# Altium PCB PCB1.PcbDoc
Units mm, origin at the board's own origin, x right, y up, seen from the top; angles counter-clockwise.
Board outline 221.8 x 169.3 mm, 4 copper layers (Top Layer, Mid Layer 1, Mid Layer 2, Bottom Layer), stack 1.592 mm thick; 54 components, 347 nets, 379 pads, 86 vias.
Unrouted connection lines stored in the file: 199.
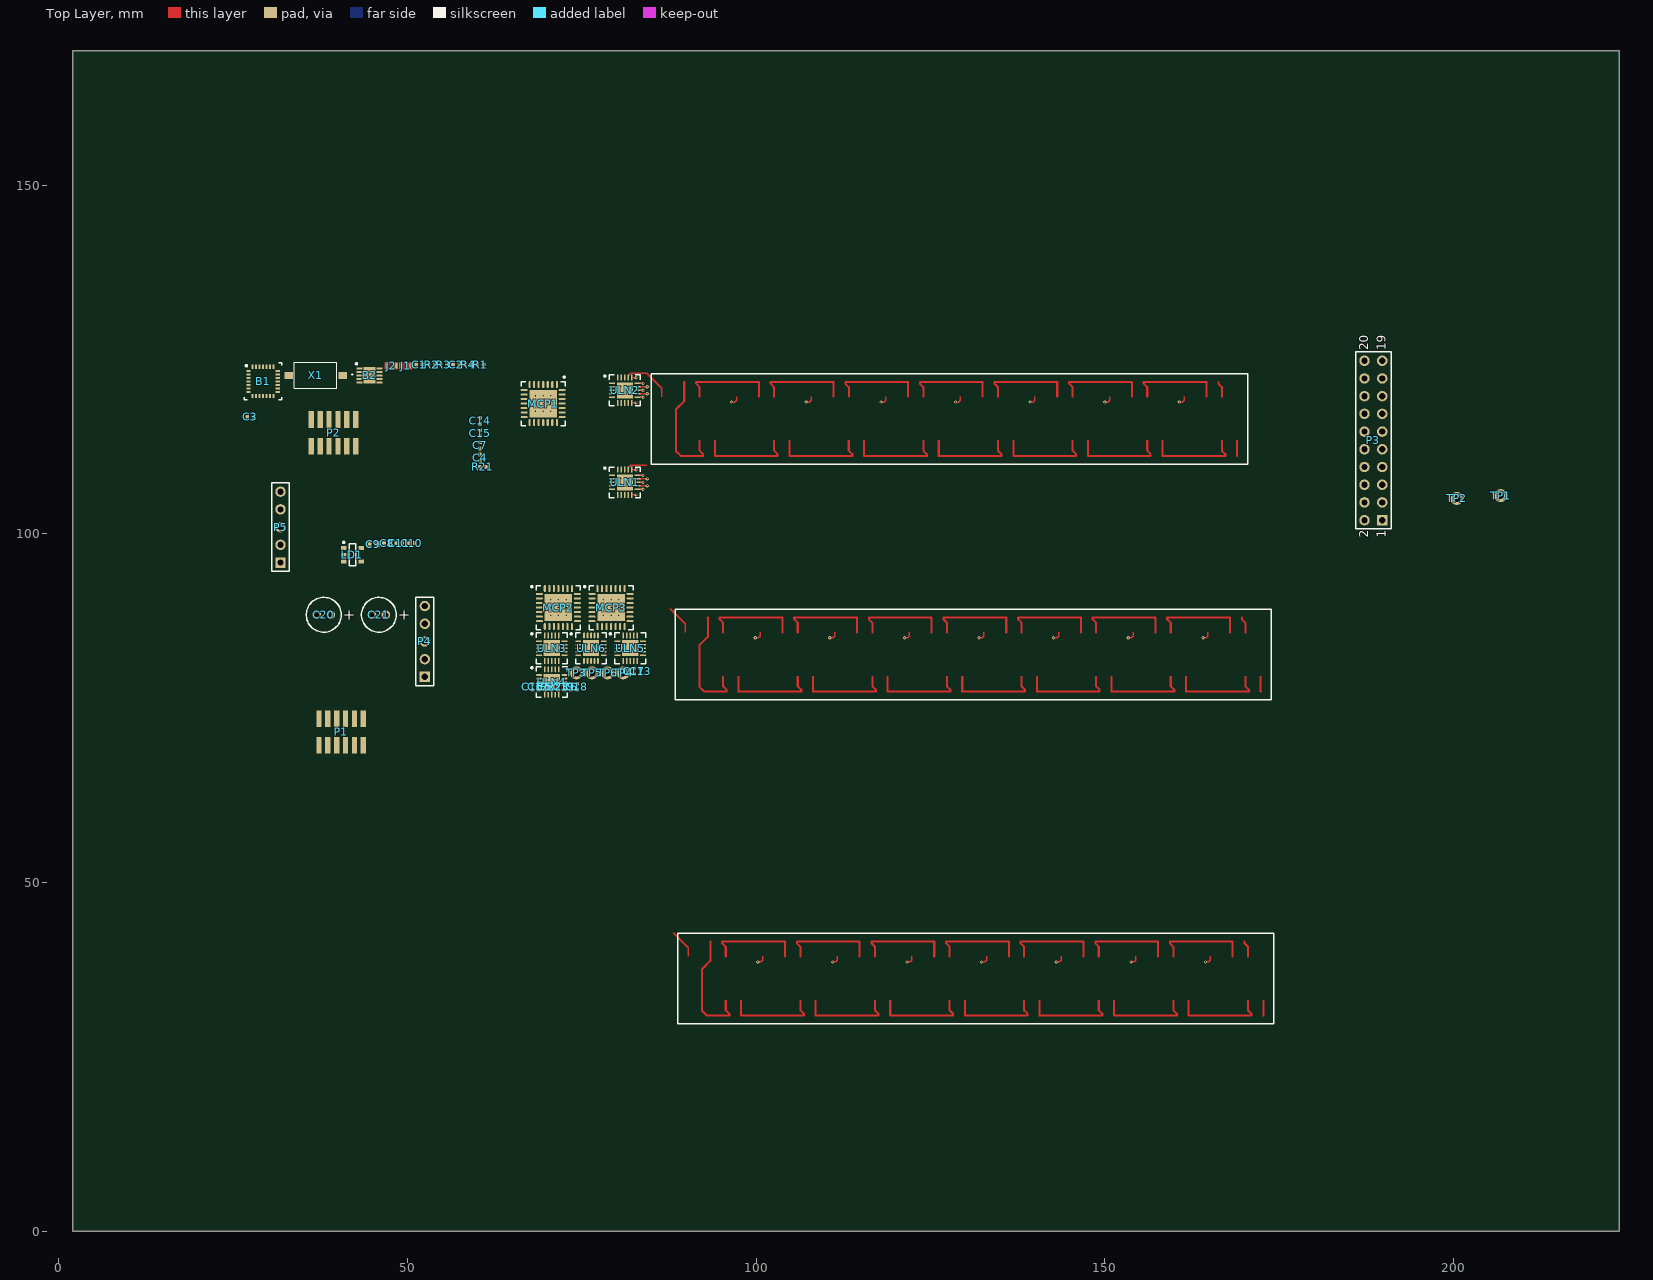
[diagram p0: Top Layer view]
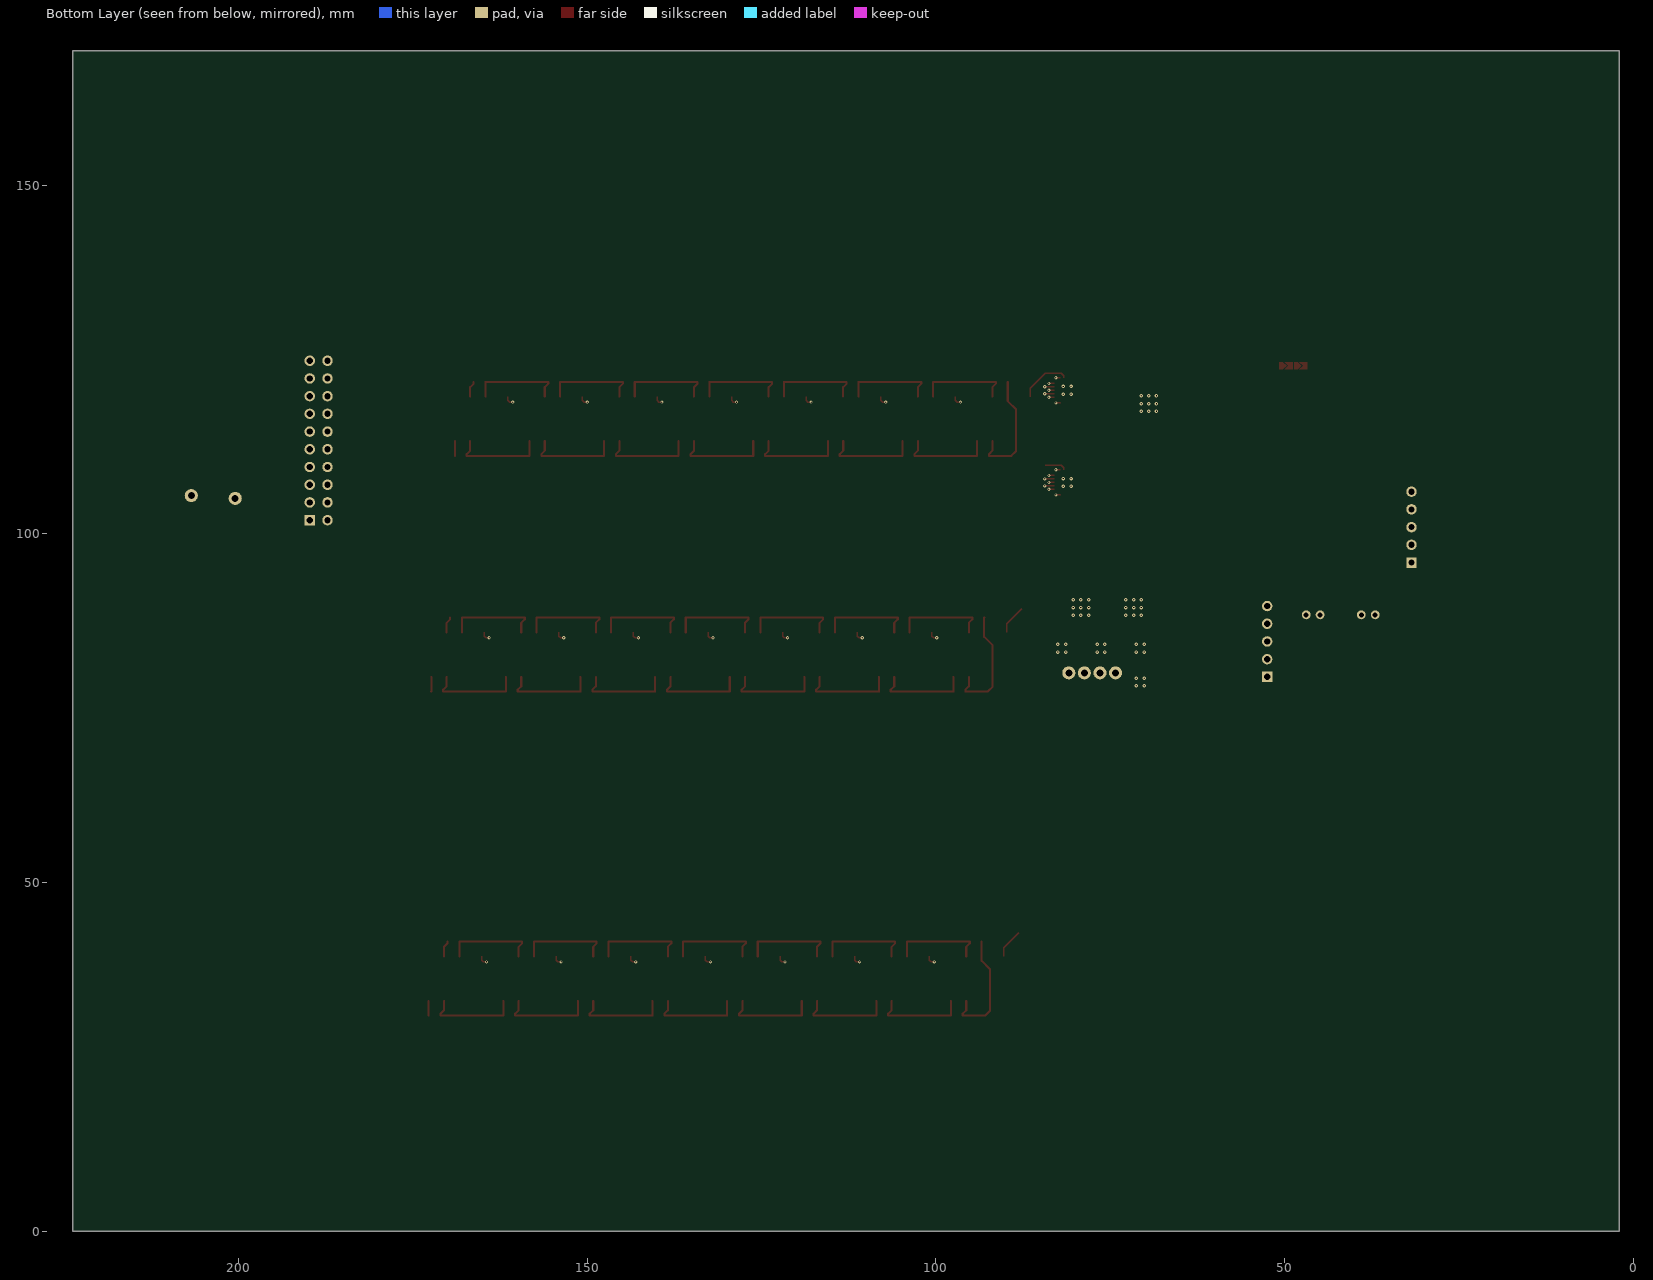
[diagram p1: Bottom Layer view, seen from below]
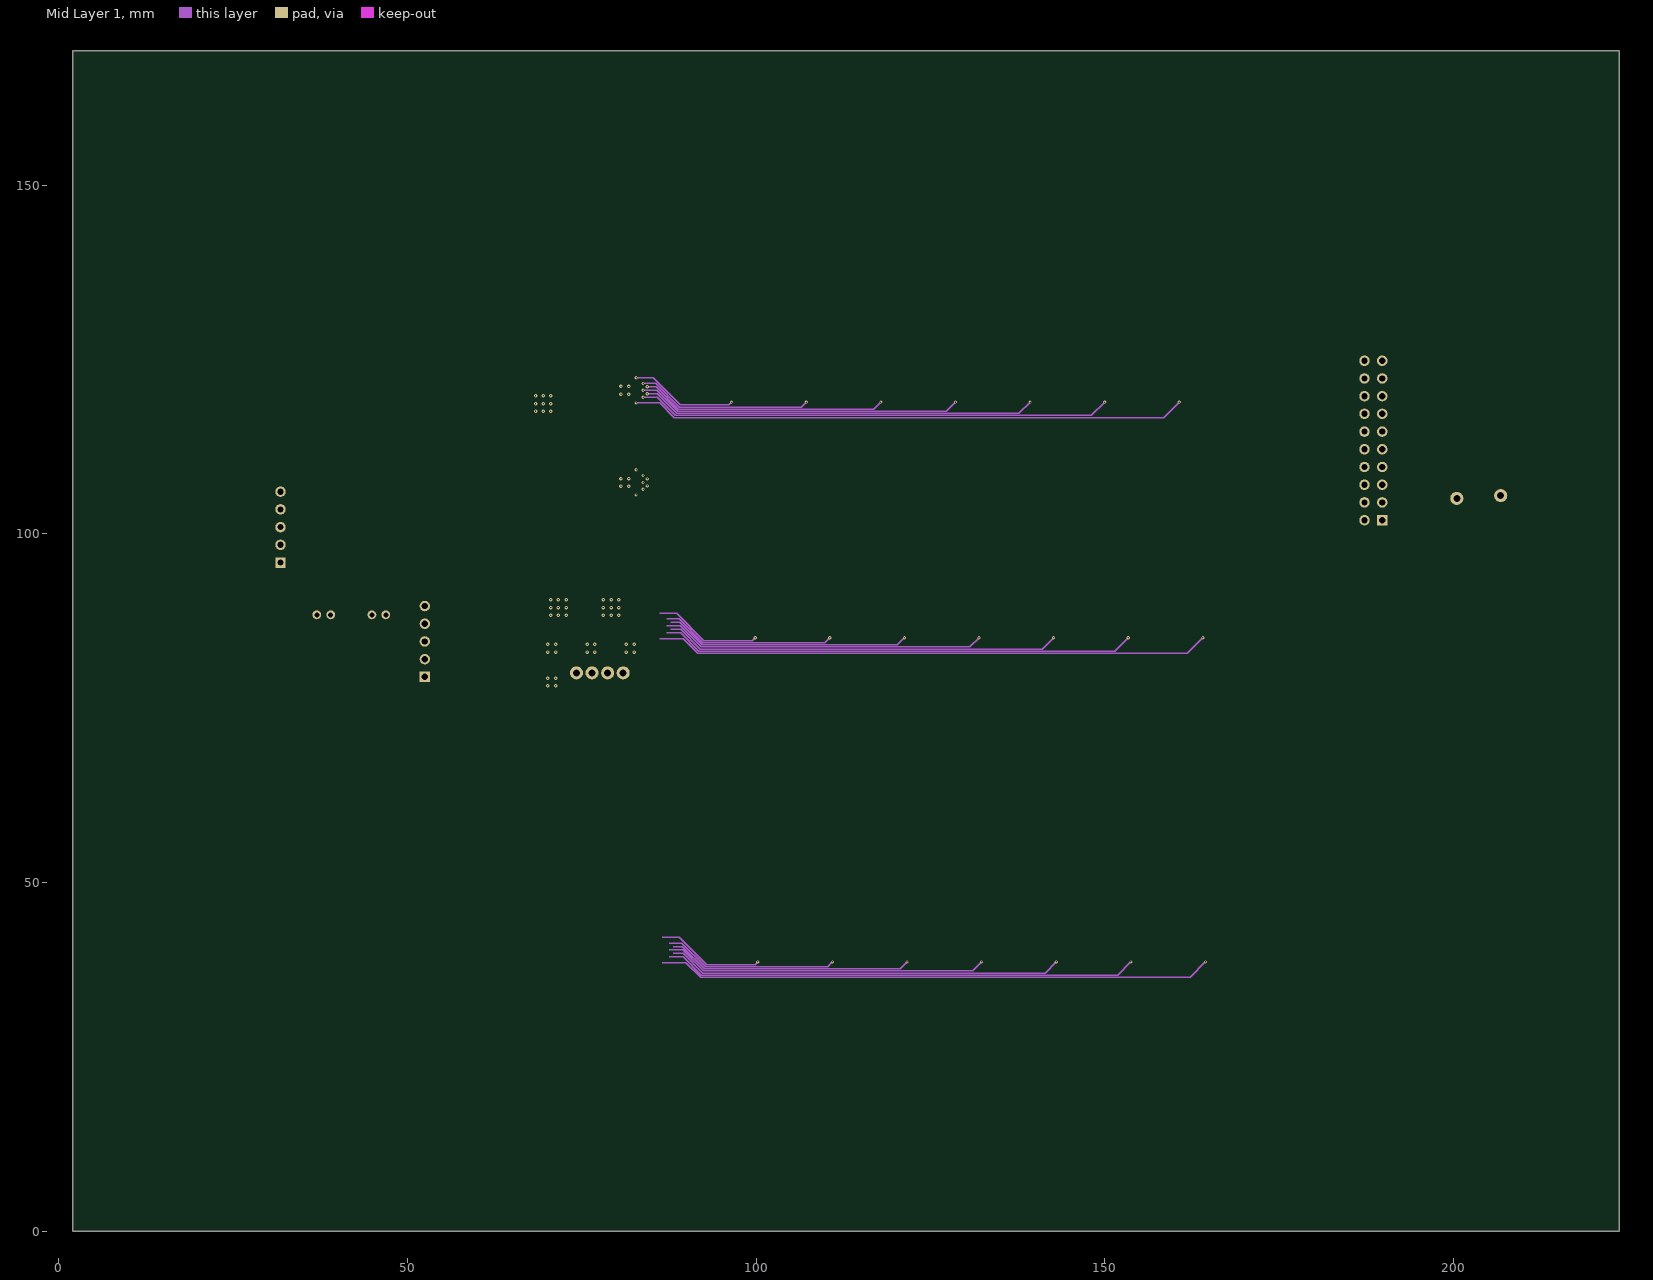
[diagram p2: Mid Layer 1]

## Layer stack, top to bottom
Top Solder: solder mask 0.013, Solder Resist, Dk 3.8
Top Layer: signal copper 0.035
Dielectric 1: prepreg 0.2104, 7628, Dk 4.6
Mid Layer 1: signal copper 0.018
Core: core 1.065, FR-4, Dk 4.5
Mid Layer 2: signal copper 0.018
Dielectric 2: prepreg 0.2104, 7628, Dk 4.6
Bottom Layer: signal copper 0.035
Bottom Solder: solder mask 0.013, Solder Resist, Dk 3.8

## Board outline
2,0 223.8,0 223.8,169.3 2,169.3

## Design rules (kind name [scope] priority, off if disabled: settings)
BoardOutlineClearance [All] p1: gap=0.2 ignorepadtopadclearanceinfootprint=FALSE
Clearance [All] p1: gap=0.102 ignorepadtopadclearanceinfootprint=FALSE except(0.127: Arc-Via Track-Via SMDPad-Via THPad-Via Via-Via Via-Fill Via-Poly Via-Region Via-Text; 0.25: Arc-Hole Track-Hole SMDPad-Hole THPad-Hole Via-Hole Fill-Hole Poly-Hole Region-Hole Text-Hole)
ComponentClearance [All] p1: gap=0.102 collisioncheckmode=3 verticalgap=0.102 showdistances=TRUE
DiffPairsRouting [All] p1: maxlimit=0.102 minlimit=0.102 mostfreqgap=0.102 toplayer_minwidth=0.102 toplayer_maxwidth=1816.048 toplayer_prefwidth=0.102 midlayer1_minwidth=0.102 midlayer1_maxwidth=1816.048 midlayer1_prefwidth=0.102 midlayer2_minwidth=0.102 midlayer2_maxwidth=1816.048 midlayer2_prefwidth=0.102 bottomlayer_minwidth=0.102 bottomlayer_maxwidth=1816.048 bottomlayer_prefwidth=0.102 maxuncoupledlength=12.7
Height [All] p1: minheight=0 maxheight=1816.048 prefheight=12.7
HoleSize [All] p1: absolutevalues=TRUE maxlimit=6.3 minlimit=0.2 maxpercent=80.000 minpercent=20.000
HoleToHoleClearance [All] p1: gap=0.25 allowstackedmicrovias=FALSE
MinimumAnnularRing [All] p1: minimumring=0.076
MinimumSolderMaskSliver [All] p1: minsoldermaskwidth=0
PlaneClearance [All] p1: clearance=0.102
PlaneConnect PlaneConnectPowerPads [InPadClass('PowerPads')] p1: planeconnectstyle=Direct reliefexpansion=0.508 reliefentries=4 reliefconductorwidth=0.254 reliefairgap=0.254
PlaneConnect [All] p2: pad.planeconnectstyle=Relief pad.reliefexpansion=0.3 pad.reliefentries=4 pad.reliefconductorwidth=0.102 pad.reliefairgap=0.102 via.planeconnectstyle=Direct via.reliefexpansion=0.3 via.reliefentries=4 via.reliefconductorwidth=0.127 via.reliefairgap=0.127
PolygonConnect PolygonConnectPowerPads [All vs (InPadClass('PowerPads'))] p1: connectstyle=Direct reliefconductorwidth=0.254 reliefentries=4 polygonreliefangle="90 Angle" airgapwidth=0.254
PolygonConnect [All] p2: thpad.connectstyle=Relief thpad.reliefconductorwidth=0.102 thpad.reliefentries=4 thpad.polygonreliefangle="90 Angle" thpad.airgapwidth=0.102 smdpad.connectstyle=Relief smdpad.reliefconductorwidth=0.102 smdpad.reliefentries=4 smdpad.polygonreliefangle="90 Angle" smdpad.airgapwidth=0.102 via.connectstyle=Direct via.reliefconductorwidth=0.127 via.reliefentries=4 via.polygonreliefangle="90 Angle" via.airgapwidth=0.127
RoomDefinition U_relay_driver [InComponentClass('U_relay_driver')] p1: confinementstyle=ConfineIn formatcopy=TRUE lockcomponents=FALSE outline 62.9,28.9 85.2,28.9 85.2,123.6 62.9,123.6
RoomDefinition U_Power [InComponentClass('U_Power')] p2: confinementstyle=ConfineIn formatcopy=TRUE lockcomponents=FALSE outline 34.4,85.8 51.4,85.8 51.4,99.4 34.4,99.4
RoomDefinition U_MCU [InComponentClass('U_MCU')] p3: confinementstyle=ConfineIn formatcopy=TRUE lockcomponents=FALSE outline 30.9,67.1 62.3,67.1 62.3,125 30.9,125
RoutingVias [All] p1: holewidth=0.2 width=0.45 viastyle="Through Hole" minholewidth=0.2 minwidth=0.45 maxholewidth=6.3 maxwidth=6.55
SilkToSilkClearance [All] p1: silktosilkclearance=0
SilkToSolderMaskClearance [IsPad] p1: minsilkscreentomaskgap=0.102 clearancetoexposedcopper=TRUE
SolderMaskExpansion [All] p1: expansion=0.075 istentingtop=FALSE
Width [All] p1: maxlimit=1816.048 minlimit=0.102 preferedwidth=0.102
20 further rules are at their usual default settings.

## Classes and differential pairs
channel class relay_ladder: U_relay_ladder1 U_relay_ladder2 U_relay_ladder3
component class U_relay_driver: C4 C5 C6 C7 C12 C13 C14 C15 C16 C17 C18 C19 MCP1 MCP2 MCP3 P3 R21 R22 R23 TP1 TP2 TP3 TP4 TP5 TP6 ULN1 ULN2 ULN3 ULN4 ULN5 ULN6
component class U_Power: C8 C9 C10 C11 C20 C21 LD1 P4 P5
component class U_MCU: B1 B2 C1 C2 C3 J1 J2 P1 P2 R1 R2 R3 R4 X1

## Components (designator, comment, footprint, x,y, rotation, side; value= is the part's Value field where it differs from the comment)
B1 "STM32C031G6U6" QFN50P400X400X60-28N-D 29.295,121.877 r0 top
B2 "XR33202EEHBTR-F" SON50P300X300X80-11N-D 44.568,122.744 r0 top
C1 "100n" R1005_0402i_L 51.713,124.289 r0 top
C2 "100n" R1005_0402i_L 56.973,124.289 r0 top
C3 "100n" R1005_0402i_L 27.46,116.8 r0 top
C4 "100n" R1005_0402i_L 60.411,110.948 r90 top
C5 "100n" R1005_0402i_L 69.783,78.08 r90 top
C6 "100n" R1005_0402i_L 73.436,78.08 r90 top
C7 "100n" R1005_0402i_L 60.411,112.701 r90 top
C8 "100n" R1005_0402i_L 47.089,98.689 r0 top
C9 "22u" C1608_0603I_L 45.076,98.519 r0 top
C10 "1u" R1005_0402i_L 50.596,98.689 r0 top
C11 "100n" R1005_0402i_L 48.843,98.689 r0 top
C12 "100n" R1005_0402i_L 68.87,78.08 r90 top
C13 "100n" R1005_0402i_L 83.429,80.313 r90 top
C14 "100n" R1005_0402i_L 60.411,116.208 r90 top
C15 "100n" R1005_0402i_L 60.411,114.455 r90 top
C16 "100n" R1005_0402i_L 67.957,78.08 r90 top
C17 "100n" R1005_0402i_L 82.516,80.313 r90 top
C18 "100n" R1005_0402i_L 74.349,78.08 r90 top
C19 "100n" R1005_0402i_L 72.523,78.08 r90 top
C20 "C+" "C AlElko 5x11 R2" 38,88.4 r0 top
C21 "C+" "C AlElko 5x11 R2" 45.9,88.4 r0 top
J1 "solder_jumper" solder_jumper_triangle 49.338,123.628 r0 top
J2 "solder_jumper" solder_jumper_triangle 47.23,123.628 r0 top
LD1 "NCP115 3.3V" TSOP95P280X110-6L 42.113,97.019 r0 top
MCP1 "MCP32017" "MCP23017 QFN" 69.475,118.7 r270 top
MCP2 "MCP32017" "MCP23017 QFN" 71.652,89.444 r0 top
MCP3 "MCP32017" "MCP23017 QFN" 79.205,89.444 r0 top
P1 "Input" "1.27mm SMD conn" 40.495,71.605 r0 top
P2 "Output" "1.27mm SMD conn" 39.4,114.5 r0 top
P3 "Header 10X2" HDR2X10 189.8,101.98 r90 top
P4 "Header 5" HDR1X5 52.5,79.5 r90 top
P5 "Header 5" HDR1X5 31.8,95.9 r90 top
R1 "10k" R1005_0402i_L 60.479,124.289 r0 top
R2 "10k" R1005_0402i_L 53.466,124.289 r0 top
R3 "120" R1005_0402i_L 55.219,124.289 r0 top
R4 "100k" R1005_0402i_L 58.726,124.289 r0 top
R21 "100k" R1005_0402i_L 60.831,109.615 r180 top
R22 "100k" R1005_0402i_L 70.696,78.08 r90 top
R23 "100k" R1005_0402i_L 71.609,78.08 r90 top
TP1 "PAD" PAD_CIRC_HOLE 206.8,105.5 r90 top
TP2 "PAD" PAD_CIRC_HOLE 200.5,105.1 r90 top
TP3 "PAD" PAD_CIRC_HOLE 74.245,80.073 r90 top
TP4 "PAD" PAD_CIRC_HOLE 80.943,80.073 r90 top
TP5 "PAD" PAD_CIRC_HOLE 76.477,80.073 r90 top
TP6 "PAD" PAD_CIRC_HOLE 78.71,80.073 r90 top
ULN1 "ULN2803" QFN127P600-8N 81.175,107.4 r0 top
ULN2 "ULN2803" QFN127P600-8N 81.175,120.6 r0 top
ULN3 "ULN2803" QFN127P600-8N 70.702,83.616 r0 top
ULN4 "ULN2803" QFN127P600-8N 70.702,78.763 r0 top
ULN5 "ULN2803" QFN127P600-8N 81.958,83.616 r0 top
ULN6 "ULN2803" QFN127P600-8N 76.33,83.616 r0 top
X1 "PTS636_SM25_SMTR_LFS" PTS636SM25SMTRLFS 36.84,122.744 r180 top

## Footprints (in the part's own frame and the unit in brackets; to place one, negate y for a bottom-side part, rotate by r counter-clockwise, add the part's x,y. Pads: shape width x height; smd on the part's side, far side on the other; paste and mask are expansions set on the pad)
"1.27mm SMD conn" [mm]
  rect 0.76x2.4 smd: 1(3.175,1.905) 2(3.175,-1.905) 3(1.905,1.905) 4(1.905,-1.905) 5(0.635,1.905) 6(0.635,-1.905) 7(-0.635,1.905) 8(-0.635,-1.905) 9(-1.905,1.905) 10(-1.905,-1.905) 11(-3.175,1.905) 12(-3.175,-1.905)
C1608_0603I_L [mm] "Chip Capacitor, 2-Leads, Body 1.57x0.85mm, IPC High Density"
  rect 0.72x0.9 smd: 1(-0.6,0) 2(0.6,0)
  body extent -0.82,-0.48 0.82,0.48, height 0.95
"C AlElko 5x11 R2" [mm]
  round 1.27 hole 0.711: 1(1,0) 2(-1,0)
  silkscreen extent -2.5,-2.5 2.5,2.5, body extent -2.5,-2.5 2.5,2.5, height 11.01
HDR1X5 [mm] "Connector; Header; 5 Position"
  rect 1.5x1.5 hole 0.9: 1(0,0)
  round 1.5 hole 0.9: 2(2.54,0) 3(5.08,0) 4(7.62,0) 5(10.16,0)
  silkscreen extent -1.27,-1.27 11.43,1.27
HDR2X10 [mm] "Connector; Header; 10x2 Position"
  rect 1.5x1.5 hole 0.9: 1(0,0)
  round 1.5 hole 0.9: 2(0,2.54) 3(2.54,0) 4(2.54,2.54) 5(5.08,0) 6(5.08,2.54) 7(7.62,0) 8(7.62,2.54) 9(10.16,0) 10(10.16,2.54) 11(12.7,0) 12(12.7,2.54) 13(15.24,0) 14(15.24,2.54) 15(17.78,0) 16(17.78,2.54) 17(20.32,0) 18(20.32,2.54) 19(22.86,0) 20(22.86,2.54)
  silkscreen extent -1.27,-1.27 24.13,3.81
"MCP23017 QFN" [mm] "QFN, 28-Leads, Body 6,00x6,00mm, Pitch 0,65mm, Thermal Pad 3,93x3,93mm, IPC High Density"
  oval 1x0.3 smd: 1(-2.725,1.95) 2(-2.725,1.3) 3(-2.725,0.65) 4(-2.725,0) 5(-2.725,-0.65) 6(-2.725,-1.3) 7(-2.725,-1.95) 15(2.725,-1.95) 16(2.725,-1.3) 17(2.725,-0.65) 18(2.725,0) 19(2.725,0.65) 20(2.725,1.3) 21(2.725,1.95)
  oval 0.3x1 smd: 8(-1.95,-2.725) 9(-1.3,-2.725) 10(-0.65,-2.725) 11(0,-2.725) 12(0.65,-2.725) 13(1.3,-2.725) 14(1.95,-2.725) 22(1.95,2.725) 23(1.3,2.725) 24(0.65,2.725) 25(0,2.725) 26(-0.65,2.725) 27(-1.3,2.725) 28(-1.95,2.725)
  rect 3.93x3.93 smd: 29(0,0)
  silkscreen extent -3.92,-3.15 3.15,3.15, body extent -3,-3 3,3, height 0.9
PAD_CIRC_HOLE [mil]
  round 74 hole 39.4: 1(0,0)
PTS636SM25SMTRLFS [mm]
  rect 1.25x1 smd: 1(-3.875,0) 2(3.875,0)
  silkscreen extent -5.3,-1.85 3.05,1.85
QFN50P400X400X60-28N-D [mm]
  rect 0.6x0.3 smd: 1(-2.1,1.5) 2(-2.1,1) 3(-2.1,0.5) 4(-2.1,0) 5(-2.1,-0.5) 6(-2.1,-1) 7(-2.1,-1.5) 15(2.1,-1.5) 16(2.1,-1) 17(2.1,-0.5) 18(2.1,0) 19(2.1,0.5) 20(2.1,1) 21(2.1,1.5)
  rect 0.3x0.6 smd: 8(-1.5,-2.1) 9(-1,-2.1) 10(-0.5,-2.1) 11(0,-2.1) 12(0.5,-2.1) 13(1,-2.1) 14(1.5,-2.1) 22(1.5,2.1) 23(1,2.1) 24(0.5,2.1) 25(0,2.1) 26(-0.5,2.1) 27(-1,2.1) 28(-1.5,2.1)
  silkscreen extent -2.67,-2.67 2.67,2.67
QFN127P600-8N [mm]
  oval 0.85x0.25 smd: 1(-1.825,1) 2(-1.825,0.5) 3(-1.825,0) 4(-1.825,-0.5) 5(-1.825,-1) 11(1.825,-1) 12(1.825,-0.5) 13(1.825,0) 14(1.825,0.5) 15(1.825,1)
  oval 0.25x0.85 smd: 6(-1,-1.825) 7(-0.5,-1.825) 8(0,-1.825) 9(0.5,-1.825) 10(1,-1.825) 16(1,1.825) 17(0.5,1.825) 18(0,1.825) 19(-0.5,1.825) 20(-1,1.825)
  rect 2.3x2.3 smd: 21(0,0)
  silkscreen extent -2.97,-2.2 2.2,2.2, body extent -2.05,-2.05 2.05,2.05, height 0.8
R1005_0402i_L [mm] "Resistor, Chip; 1.00 mm L X 0.50 mm W X 0.40 mm H body"
  rrect50% 0.52x0.56 smd: 1(-0.44,0) 2(0.44,0)
  body extent -0.5,-0.25 0.5,0.25, height 0.4
solder_jumper_triangle [mil]
  rect 15x30 smd paste+0 mask+0: 1(45,20) 2(-10,20)
  Top Layer region: 5,20 25,40 -20,40 -20,0 25,0
  Top Layer region: 55,40 35,40 15,20 35,0 55,0
  Top Layer region: 3.94,0
SON50P300X300X80-11N-D [mm]
  rect 0.85x0.3 smd: 1(-1.45,1) 2(-1.45,0.5) 3(-1.45,0) 4(-1.45,-0.5) 5(-1.45,-1) 6(1.45,-1) 7(1.45,-0.5) 8(1.45,0) 9(1.45,0.5) 10(1.45,1)
  rect 1.7x2.4 smd: 11(0,0)
  silkscreen extent -2,1.53 -1.75,1.77
TSOP95P280X110-6L [mm] "TSOP, 6-Leads, Body 2,87x1,50mm, Pitch 0,95mm, IPC High Density"
  rect 0.8x0.55 smd: 1(-1.25,0.95) 2(-1.25,0) 3(-1.25,-0.95) 4(1.25,-0.95) 5(1.25,0.95)
  silkscreen extent -1.37,-1.6 0.45,1.9, body extent -1.38,-1.6 1.38,1.6, height 1.1

## Part data
B1: "Mainstream Arm Cortex-M0+ MCU with 32 Kbytes of Flash memory, 12 Kbytes RAM, 48 MHz CPU, 2x USART, timers, ADC, comm. I/F, 2-3.6V", Manufacturer_Name=STMicroelectronics, Mouser Part Number=511-STM32C031G6U6, Datasheet Link=https://www.st.com/resource/en/datasheet/stm32c031c4.pdf, Geometry.Height=0.6mm, Manufacturer_Part_Number=STM32C031G6U6, Mouser Price/Stock=https://www.mouser.co.uk/ProductDetail/STMicroelectronics/STM32C031G6U6?qs=IPgv5n7u5QZqRf3nOTChhw%3D%3D
B2: "RS-422/RS-485 Interface IC Wide Supply Trans with I/O Interface", Manufacturer_Name="MaxLinear, Inc.", Mouser Part Number=701-XR33202EEHBTR-F, Datasheet Link=https://www.maxlinear.com/ds/xr33202.pdf, Geometry.Height=0.8mm, Manufacturer_Part_Number=XR33202EEHBTR-F, Mouser Price/Stock=https://www.mouser.co.uk/ProductDetail/MaxLinear/XR33202EEHBTR-F?qs=GtWAI9k6EVi4nRW8bj1LFw%3D%3D
C1 C2 C3 C4 C5 C6 C7 C8 C9 C10 C11 C12 C13 C14 C15 C16 C17 C18 C19: library part C, "Capacitor"
C20 C21: "Capacitor Polarized"
P1 P2: library part "Header 6X2", "Header, 6-Pin, Dual row", LatestRevisionDate=17-Jul-2002, LatestRevisionNote="Re-released for DXP Platform.", Publisher="Altium Limited"
P3: "Header, 10-Pin, Dual row", LatestRevisionDate=17-Jul-2002, LatestRevisionNote="Re-released for DXP Platform.", Publisher="Altium Limited"
P4 P5: "Header, 5-Pin", LatestRevisionDate=17-Jul-2002, LatestRevisionNote="Re-released for DXP Platform.", Publisher="Altium Limited"
R1 R2 R3 R4 R21 R22 R23: library part R, "R"
X1: "Tactile Switches Tact 50mA 12VDC, 6.0x3.5, 2.5mm H, 180gf, G leads, No ground pin, White Actuator", Manufacturer_Name="C & K COMPONENTS", Manufacturer_Part_Number="PTS636 SM25 SMTR LFS", Mouser Part Number=611-PTS636SM25SMTRLF, Datasheet Link="https://componentsearchengine.com/Datasheets/1/PTS636 SM25 SMTR LFS.pdf", Geometry.Height=2.7mm, Mouser Price/Stock=https://www.mouser.co.uk/ProductDetail/CK/PTS636-SM25-SMTR-LFS?qs=vLWxofP3U2yIXR4iooxesw%3D%3D

## Via types
v1: diameter 0.5, hole 0.2, Top Layer to Bottom Layer, 51 vias
v2: diameter 0.45, hole 0.2, Top Layer to Bottom Layer, 35 vias

## Nets (pads, with @x,y where several pads share a name; then routed paths per layer and width w, separated by ;. In a path a pad name is that pad's centre, name@x,y a point inside that pad or via, vN(x,y) a via of type N, cw(c..) or ccw(c..) an arc to the next point about the centre after c; other vN are vias at no path point)
+3V3: B1.3 B2.1 C1.1 C3.1 C7.2 C10.1 C11.1 C12.2 C13.2 LD1.5 MCP1.5 MCP2.5 MCP3.5 R1.1 R2.1 R4.1 R21.1 R22.1 R23.1
+12: C14.1 C15.1 C16.1 C17.1 C18.1 C19.1 C20.1 P4.2 P4.4 P5.2 P5.4 ULN1.9 ULN2.9 ULN3.9 ULN4.9 ULN5.9 ULN6.9
A1: P3.3
A2: P3.7
A3: P3.11
A4: P3.15
A5: P3.19
A6: 
A_N: B2.8 P1.6 P2.6 R3.2
AGND: P3.4 P3.8 P3.12 P3.16 P3.20
B1: P3.2 TP1.1
B2: P3.6 TP2.1
B3: P3.10 TP3.1
B4: P3.14 TP4.1
B5: P3.18 TP5.1
B6: TP6.1
B_P: B2.9 J2.1 P1.7 P2.7
BTN: B1.7 X1.2
C1: P3.1
C2: P3.5
C3: P3.9
C4: P3.13
C5: P3.17
C6: 
GND: B1.4 B2.6 B2.11 C1.2 C2.2 C3.2 C4.1 C5.1 C6.1 C7.1 C8.2 C9.2 C10.2 C11.2 C12.1 C13.1 C20.2 C21.2 LD1.2 MCP1.6 MCP1.11 MCP1.12 MCP1.13 MCP2.6 MCP2.11 MCP2.12 MCP2.13 MCP3.6 MCP3.11 MCP3.12 MCP3.13 P1.5 P1.8 P2.5 P2.8 P4.1 P4.5 P5.1 P5.5 X1.1
INT: B1.6 P1.10 P2.10
MISO: J1.1 P1.1 P2.1
MISO_MCU: B1.24 J1.2 P2.2
MOSI_MCU: B1.25 P1.2
NetC4_2: C4.2 MCP1.14 R21.2
NetC5_2: C5.2 MCP2.14 R22.2
NetC6_2: C6.2 MCP3.14 R23.2
NetC22_2: 
NetC23_2: 
NetJ2_2: J2.2 R3.1
NetK1_U_relay_ladder1_3: 
NetK1_U_relay_ladder1_7: 
NetK1_U_relay_ladder1_8: ULN1.10 | length 0.6
  Top Layer w0.2: ULN1.10 82.175,105.577 82.198,105.6 v2(82.8,105.6)
NetK1_U_relay_ladder2_3: 
NetK1_U_relay_ladder2_7: 
NetK1_U_relay_ladder2_8: ULN2.10 | length 81.7
  Top Layer w0.2: ULN2.10 82.175,118.777 82.198,118.8 v2(82.8,118.8) ; v2(160.7,118.9) 161.153,118.9 161.403,119.15 161.403,119.7
  Mid Layer 1 w0.2: v2(82.8,118.8) 86.173,118.8 88.283,116.69 158.49,116.69 v2(160.7,118.9)
NetK1_U_relay_ladder3_3: 
NetK1_U_relay_ladder3_7: 
NetK1_U_relay_ladder3_8: ULN3.10
NetK1_U_relay_ladder4_3: 
NetK1_U_relay_ladder4_7: 
NetK1_U_relay_ladder4_8: ULN4.10
NetK1_U_relay_ladder5_3: 
NetK1_U_relay_ladder5_7: 
NetK1_U_relay_ladder5_8: ULN5.10
NetK1_U_relay_ladder6_3: 
NetK1_U_relay_ladder6_7: 
NetK1_U_relay_ladder6_8: ULN6.10
NetK1_U_relay_ladder7_3: 
NetK1_U_relay_ladder7_7: 
NetK1_U_relay_ladder7_8: 
NetK1_U_relay_ladder8_3: 
NetK1_U_relay_ladder8_7: 
NetK1_U_relay_ladder8_8: 
NetK1_U_relay_ladder9_3: 
NetK1_U_relay_ladder9_7: 
NetK1_U_relay_ladder9_8: 
NetK1_U_relay_ladder10_3: 
NetK1_U_relay_ladder10_7: 
NetK1_U_relay_ladder10_8: 
NetK2_U_relay_ladder1_3: 
NetK2_U_relay_ladder1_7: 
NetK2_U_relay_ladder1_8: ULN1.11 | length 0.8
  Top Layer w0.2: ULN1.11 v2(83.8,106.4)
NetK2_U_relay_ladder2_3: 
NetK2_U_relay_ladder2_7: 
NetK2_U_relay_ladder2_8: ULN2.11 | length 70.2
  Top Layer w0.2: ULN2.11 v2(83.8,119.6) ; v2(150,118.9) 150.453,118.9 150.703,119.15 150.703,119.7
  Mid Layer 1 w0.2: v2(83.8,119.6) 85.8,119.6 88.408,116.992 148.092,116.992 v2(150,118.9)
NetK2_U_relay_ladder3_3: 
NetK2_U_relay_ladder3_7: 
NetK2_U_relay_ladder3_8: ULN3.11
NetK2_U_relay_ladder4_3: 
NetK2_U_relay_ladder4_7: 
NetK2_U_relay_ladder4_8: ULN4.11
NetK2_U_relay_ladder5_3: 
NetK2_U_relay_ladder5_7: 
NetK2_U_relay_ladder5_8: ULN5.11
NetK2_U_relay_ladder6_3: 
NetK2_U_relay_ladder6_7: 
NetK2_U_relay_ladder6_8: ULN6.11
NetK2_U_relay_ladder7_3: 
NetK2_U_relay_ladder7_7: 
NetK2_U_relay_ladder7_8: 
NetK2_U_relay_ladder8_3: 
NetK2_U_relay_ladder8_7: 
NetK2_U_relay_ladder8_8: 
NetK2_U_relay_ladder9_3: 
NetK2_U_relay_ladder9_7: 
NetK2_U_relay_ladder9_8: 
NetK2_U_relay_ladder10_3: 
NetK2_U_relay_ladder10_7: 
NetK2_U_relay_ladder10_8: 
NetK3_U_relay_ladder1_3: 
NetK3_U_relay_ladder1_7: 
NetK3_U_relay_ladder1_8: ULN1.12 | length 1.4
  Top Layer w0.2: ULN1.12 v2(84.4,106.9)
NetK3_U_relay_ladder2_3: 
NetK3_U_relay_ladder2_7: 
NetK3_U_relay_ladder2_8: ULN2.12 | length 59.5
  Top Layer w0.2: ULN2.12 v2(84.4,120.1) ; v2(139.3,118.9) 139.753,118.9 140.003,119.15 140.003,119.7
  Mid Layer 1 w0.2: v2(84.4,120.1) 85.8,120.1 88.606,117.294 137.694,117.294 v2(139.3,118.9)
NetK3_U_relay_ladder3_3: 
NetK3_U_relay_ladder3_7: 
NetK3_U_relay_ladder3_8: ULN3.12
NetK3_U_relay_ladder4_3: 
NetK3_U_relay_ladder4_7: 
NetK3_U_relay_ladder4_8: ULN4.12
NetK3_U_relay_ladder5_3: 
NetK3_U_relay_ladder5_7: 
NetK3_U_relay_ladder5_8: ULN5.12
NetK3_U_relay_ladder6_3: 
NetK3_U_relay_ladder6_7: 
NetK3_U_relay_ladder6_8: ULN6.12
NetK3_U_relay_ladder7_3: 
NetK3_U_relay_ladder7_7: 
NetK3_U_relay_ladder7_8: 
NetK3_U_relay_ladder8_3: 
NetK3_U_relay_ladder8_7: 
NetK3_U_relay_ladder8_8: 
NetK3_U_relay_ladder9_3: 
NetK3_U_relay_ladder9_7: 
NetK3_U_relay_ladder9_8: 
NetK3_U_relay_ladder10_3: 
NetK3_U_relay_ladder10_7: 
NetK3_U_relay_ladder10_8: 
NetK4_U_relay_ladder1_3: 
NetK4_U_relay_ladder1_7: 
NetK4_U_relay_ladder1_8: ULN1.13 | length 0.8
  Top Layer w0.2: ULN1.13 v2(83.8,107.4)
NetK4_U_relay_ladder2_3: 
NetK4_U_relay_ladder2_7: 
NetK4_U_relay_ladder2_8: ULN2.13 | length 48.7
  Top Layer w0.2: ULN2.13 v2(83.8,120.6) ; v2(128.6,118.9) 129.053,118.9 129.303,119.15 129.303,119.7
  Mid Layer 1 w0.2: v2(83.8,120.6) 85.747,120.6 88.752,117.595 127.295,117.595 v2(128.6,118.9)
NetK4_U_relay_ladder3_3: 
NetK4_U_relay_ladder3_7: 
NetK4_U_relay_ladder3_8: ULN3.13
NetK4_U_relay_ladder4_3: 
NetK4_U_relay_ladder4_7: 
NetK4_U_relay_ladder4_8: ULN4.13
NetK4_U_relay_ladder5_3: 
NetK4_U_relay_ladder5_7: 
NetK4_U_relay_ladder5_8: ULN5.13
NetK4_U_relay_ladder6_3: 
NetK4_U_relay_ladder6_7: 
NetK4_U_relay_ladder6_8: ULN6.13
NetK4_U_relay_ladder7_3: 
NetK4_U_relay_ladder7_7: 
NetK4_U_relay_ladder7_8: 
NetK4_U_relay_ladder8_3: 
NetK4_U_relay_ladder8_7: 
NetK4_U_relay_ladder8_8: 
NetK4_U_relay_ladder9_3: 
NetK4_U_relay_ladder9_7: 
NetK4_U_relay_ladder9_8: 
NetK4_U_relay_ladder10_3: 
NetK4_U_relay_ladder10_7: 
NetK4_U_relay_ladder10_8: 
NetK5_U_relay_ladder1_3: 
NetK5_U_relay_ladder1_7: 
NetK5_U_relay_ladder1_8: ULN1.14 | length 1.4
  Top Layer w0.2: ULN1.14 v2(84.4,107.9)
NetK5_U_relay_ladder2_3: 
NetK5_U_relay_ladder2_7: 
NetK5_U_relay_ladder2_8: ULN2.14 | length 38
  Top Layer w0.2: ULN2.14 v2(84.4,121.1) ; v2(117.9,118.9) 118.353,118.9 118.603,119.15 118.603,119.7
  Mid Layer 1 w0.2: v2(84.4,121.1) 85.673,121.1 88.877,117.897 116.897,117.897 v2(117.9,118.9)
NetK5_U_relay_ladder3_3: 
NetK5_U_relay_ladder3_7: 
NetK5_U_relay_ladder3_8: ULN3.14
NetK5_U_relay_ladder4_3: 
NetK5_U_relay_ladder4_7: 
NetK5_U_relay_ladder4_8: ULN4.14
NetK5_U_relay_ladder5_3: 
NetK5_U_relay_ladder5_7: 
NetK5_U_relay_ladder5_8: ULN5.14
NetK5_U_relay_ladder6_3: 
NetK5_U_relay_ladder6_7: 
NetK5_U_relay_ladder6_8: ULN6.14
NetK5_U_relay_ladder7_3: 
NetK5_U_relay_ladder7_7: 
NetK5_U_relay_ladder7_8: 
NetK5_U_relay_ladder8_3: 
NetK5_U_relay_ladder8_7: 
NetK5_U_relay_ladder8_8: 
NetK5_U_relay_ladder9_3: 
NetK5_U_relay_ladder9_7: 
NetK5_U_relay_ladder9_8: 
NetK5_U_relay_ladder10_3: 
NetK5_U_relay_ladder10_7: 
NetK5_U_relay_ladder10_8: 
NetK6_U_relay_ladder1_3: 
NetK6_U_relay_ladder1_7: 
NetK6_U_relay_ladder1_8: ULN1.15 | length 0.8
  Top Layer w0.2: ULN1.15 v2(83.8,108.4)
NetK6_U_relay_ladder2_3: 
NetK6_U_relay_ladder2_7: 
NetK6_U_relay_ladder2_8: ULN2.15 | length 27.3
  Top Layer w0.2: ULN2.15 v2(83.8,121.6) ; v2(107.2,118.9) 107.653,118.9 107.903,119.15 107.903,119.7
  Mid Layer 1 w0.2: v2(83.8,121.6) 85.6,121.6 89.002,118.198 106.498,118.198 v2(107.2,118.9)
NetK6_U_relay_ladder3_3: 
NetK6_U_relay_ladder3_7: 
NetK6_U_relay_ladder3_8: ULN3.15
NetK6_U_relay_ladder4_3: 
NetK6_U_relay_ladder4_7: 
NetK6_U_relay_ladder4_8: ULN4.15
NetK6_U_relay_ladder5_3: 
NetK6_U_relay_ladder5_7: 
NetK6_U_relay_ladder5_8: ULN5.15
NetK6_U_relay_ladder6_3: 
NetK6_U_relay_ladder6_7: 
NetK6_U_relay_ladder6_8: ULN6.15
NetK6_U_relay_ladder7_3: 
NetK6_U_relay_ladder7_7: 
NetK6_U_relay_ladder7_8: 
NetK6_U_relay_ladder8_3: 
NetK6_U_relay_ladder8_7: 
NetK6_U_relay_ladder8_8: 
NetK6_U_relay_ladder9_3: 
NetK6_U_relay_ladder9_7: 
NetK6_U_relay_ladder9_8: 
NetK6_U_relay_ladder10_3: 
NetK6_U_relay_ladder10_7: 
NetK6_U_relay_ladder10_8: 
NetK7_U_relay_ladder1_3: 
NetK7_U_relay_ladder1_7: 
NetK7_U_relay_ladder1_8: ULN1.16 | length 0.6
  Top Layer w0.2: ULN1.16 82.175,109.223 82.198,109.2 v2(82.8,109.2)
NetK7_U_relay_ladder2_3: 
NetK7_U_relay_ladder2_7: 
NetK7_U_relay_ladder2_8: ULN2.16 | length 17.5
  Top Layer w0.2: ULN2.16 82.175,122.423 82.198,122.4 v2(82.8,122.4) ; v2(96.5,118.9) 96.953,118.9 97.203,119.15 97.203,119.7
  Mid Layer 1 w0.2: v2(82.8,122.4) 85.253,122.4 89.153,118.5 96.1,118.5 v2(96.5,118.9)
NetK7_U_relay_ladder3_3: 
NetK7_U_relay_ladder3_7: 
NetK7_U_relay_ladder3_8: ULN3.16
NetK7_U_relay_ladder4_3: 
NetK7_U_relay_ladder4_7: 
NetK7_U_relay_ladder4_8: ULN4.16
NetK7_U_relay_ladder5_3: 
NetK7_U_relay_ladder5_7: 
NetK7_U_relay_ladder5_8: ULN5.16
NetK7_U_relay_ladder6_3: 
NetK7_U_relay_ladder6_7: 
NetK7_U_relay_ladder6_8: ULN6.16
NetK7_U_relay_ladder7_3: 
NetK7_U_relay_ladder7_7: 
NetK7_U_relay_ladder7_8: 
NetK7_U_relay_ladder8_3: 
NetK7_U_relay_ladder8_7: 
NetK7_U_relay_ladder8_8: 
NetK7_U_relay_ladder9_3: 
NetK7_U_relay_ladder9_7: 
NetK7_U_relay_ladder9_8: 
NetK7_U_relay_ladder10_3: 
NetK7_U_relay_ladder10_7: 
NetK7_U_relay_ladder10_8: 
NetK8_U_relay_ladder1_8: ULN1.17 | length 3.1
  Top Layer w0.2: ULN1.17 81.675,109.511 82.015,109.852 84.348,109.852
NetK8_U_relay_ladder2_8: ULN2.17 | length 7.3
  Top Layer w0.2: ULN2.17 81.675,122.711 82.015,123.052 84.348,123.052 86.5,120.9 86.5,119.703 86.503,119.7
NetK8_U_relay_ladder3_8: ULN3.17
NetK8_U_relay_ladder4_8: ULN4.17
NetK8_U_relay_ladder5_8: ULN5.17
NetK8_U_relay_ladder6_8: ULN6.17
NetK8_U_relay_ladder7_8: 
NetK8_U_relay_ladder8_8: 
NetK8_U_relay_ladder9_8: 
NetK8_U_relay_ladder10_8: 
NetMCP1_1: MCP1.1 ULN2.2
NetMCP1_2: MCP1.2 ULN2.1
NetMCP1_3: MCP1.3 ULN2.20
NetMCP1_4: MCP1.4 ULN2.19
NetMCP1_17: MCP1.17 ULN1.6
NetMCP1_18: MCP1.18 ULN1.5
NetMCP1_19: MCP1.19 ULN1.4
NetMCP1_20: MCP1.20 ULN1.3
NetMCP1_21: MCP1.21 ULN1.2
NetMCP1_22: MCP1.22 ULN1.1
NetMCP1_23: MCP1.23 ULN1.20
NetMCP1_24: MCP1.24 ULN1.19
NetMCP1_25: MCP1.25 ULN2.6
NetMCP1_26: MCP1.26 ULN2.5
NetMCP1_27: MCP1.27 ULN2.4
NetMCP1_28: MCP1.28 ULN2.3
NetMCP2_1: MCP2.1 ULN4.2
NetMCP2_2: MCP2.2 ULN4.1
NetMCP2_3: MCP2.3 ULN4.20
NetMCP2_4: MCP2.4 ULN4.19
NetMCP2_17: MCP2.17 ULN3.6
NetMCP2_18: MCP2.18 ULN3.5
NetMCP2_19: MCP2.19 ULN3.4
NetMCP2_20: MCP2.20 ULN3.3
NetMCP2_21: MCP2.21 ULN3.2
NetMCP2_22: MCP2.22 ULN3.1
NetMCP2_23: MCP2.23 ULN3.20
NetMCP2_24: MCP2.24 ULN3.19
NetMCP2_25: MCP2.25 ULN4.6
NetMCP2_26: MCP2.26 ULN4.5
NetMCP2_27: MCP2.27 ULN4.4
NetMCP2_28: MCP2.28 ULN4.3
NetMCP3_1: MCP3.1 ULN6.2
NetMCP3_2: MCP3.2 ULN6.1
NetMCP3_3: MCP3.3 ULN6.20
NetMCP3_4: MCP3.4 ULN6.19
NetMCP3_17: MCP3.17 ULN5.6
NetMCP3_18: MCP3.18 ULN5.5
NetMCP3_19: MCP3.19 ULN5.4
NetMCP3_20: MCP3.20 ULN5.3
NetMCP3_21: MCP3.21 ULN5.2
NetMCP3_22: MCP3.22 ULN5.1
NetMCP3_23: MCP3.23 ULN5.20
NetMCP3_24: MCP3.24 ULN5.19
NetMCP3_25: MCP3.25 ULN6.6
NetMCP3_26: MCP3.26 ULN6.5
NetMCP3_27: MCP3.27 ULN6.4
NetMCP3_28: MCP3.28 ULN6.3
NetMCP4_1: 
NetMCP4_2: 
NetMCP4_3: 
NetMCP4_4: 
NetMCP4_17: 
NetMCP4_18: 
NetMCP4_19: 
NetMCP4_20: 
NetMCP4_21: 
NetMCP4_22: 
NetMCP4_23: 
NetMCP4_24: 
NetMCP4_25: 
NetMCP4_26: 
NetMCP4_27: 
NetMCP4_28: 
NetMCP5_1: 
NetMCP5_2: 
NetMCP5_3: 
NetMCP5_4: 
NetMCP5_17: 
NetMCP5_18: 
NetMCP5_19: 
NetMCP5_20: 
NetMCP5_21: 
NetMCP5_22: 
NetMCP5_23: 
NetMCP5_24: 
NetMCP5_25: 
NetMCP5_26: 
NetMCP5_27: 
NetMCP5_28: 
R\E\S\E\T\: B1.5 P1.9 P2.9 R4.2
RGND: C14.2 C15.2 C16.2 C17.2 C18.2 C19.2 ULN1.8 ULN1.21 ULN2.8 ULN2.21 ULN3.8 ULN3.21 ULN4.8 ULN4.21 ULN5.8 ULN5.21 ULN6.8 ULN6.21
  other v1: 70.152,78.213 71.252,78.213 70.152,79.313 71.252,79.313 70.152,83.066 71.252,83.066 75.78,83.066 76.88,83.066 81.408,83.066 82.508,83.066 70.152,84.166 71.252,84.166 75.78,84.166 76.88,84.166 81.408,84.166 82.508,84.166 80.625,106.85 81.725,106.85 80.625,107.95 81.725,107.95 80.625,120.05 81.725,120.05 80.625,121.15 81.725,121.15
RS485_DE: B1.19 B2.3 B2.4
RS485_RX: B1.27 B2.2
RS485_TX: B1.26 B2.5
S\S\: B1.22 P1.4 P2.4
SCK: B1.23 P1.3 P2.3
SCL_DRV: B1.1 MCP1.8 MCP2.8 MCP3.8 R1.2
SDA_DRV: B1.28 MCP1.9 MCP2.9 MCP3.9 R2.2
SWCLK: B1.21 P1.12 P2.12
SWDIO: B1.20 P1.11 P2.11
"VCC 5V": B2.10 C2.1 C8.1 C9.1 C21.1 LD1.1 LD1.3 P4.3 P5.3
pads on no net: B1.2 B1.8 B1.9 B1.10 B1.11 B1.12 B1.13 B1.14 B1.15 B1.16 B1.17 B1.18 B2.7 LD1.4 MCP1.7 MCP1.10 MCP1.15 MCP1.16 MCP1.29 MCP2.7 MCP2.10 MCP2.15 MCP2.16 MCP2.29 MCP3.7 MCP3.10 MCP3.15 MCP3.16 MCP3.29 ULN1.7 ULN1.18 ULN2.7 ULN2.18 ULN3.7 ULN3.18 ULN4.7 ULN4.18 ULN5.7 ULN5.18 ULN6.7 ULN6.18
copper on no net: | length 1315.2
  Top Layer w0.2: 87.726,89.255 89.877,87.103 89.877,85.906 89.88,85.903 ; 88.101,42.782 90.253,40.631 90.253,39.434 90.255,39.431 ; v2(99.877,85.103) 100.33,85.103 100.58,85.353 100.58,85.903 ; v2(100.253,38.631) 100.705,38.631 100.955,38.881 100.955,39.431 ; v2(110.577,85.103) 111.03,85.103 111.28,85.353 111.28,85.903 ; v2(110.953,38.631) 111.405,38.631 111.655,38.881 111.655,39.431 ; v2(121.277,85.103) 121.73,85.103 121.98,85.353 121.98,85.903 ; v2(121.653,38.631) 122.105,38.631 122.355,38.881 122.355,39.431 ; v2(131.977,85.103) 132.43,85.103 132.68,85.353 132.68,85.903 ; v2(132.353,38.631) 132.805,38.631 133.055,38.881 133.055,39.431 ; v2(142.677,85.103) 143.13,85.103 143.38,85.353 143.38,85.903 ; v2(143.053,38.631) 143.505,38.631 143.755,38.881 143.755,39.431 ; v2(153.377,85.103) 153.83,85.103 154.08,85.353 154.08,85.903 ; v2(153.753,38.631) 154.205,38.631 154.455,38.881 154.455,39.431 ; v2(164.077,85.103) 164.53,85.103 164.78,85.353 164.78,85.903 ; v2(164.453,38.631) 164.905,38.631 165.155,38.881 165.155,39.431
  Top Layer w0.3: 89.7,121.8 89.702,121.798 89.702,119.702 89.703,119.7 89.703,119.05 88.5,117.847 88.5,111.892 89.192,111.2 90.208,111.2 92.4,111.2 92.4,111.45 91.9,111.95 91.9,113.299 ; 91.4,121.8 91.4,121.55 91.9,121.05 91.9,119.701 ; 91.902,119.699 91.902,121.049 91.402,121.549 91.402,121.799 100.402,121.799 100.403,121.797 100.403,119.7 100.404,119.699 ; 93.077,88.003 93.079,88.001 93.079,85.905 93.081,85.903 93.081,85.253 91.877,84.05 91.877,78.095 92.569,77.403 93.585,77.403 95.777,77.403 95.777,77.653 95.277,78.153 95.277,79.502 ; 93.453,41.531 93.454,41.529 93.454,39.433 93.456,39.431 93.456,38.781 92.253,37.578 92.253,31.623 92.945,30.931 93.961,30.931 96.153,30.931 96.153,31.181 95.653,31.681 95.653,33.03 ; 94.097,113.3 94.099,113.298 94.099,111.201 94.1,111.2 103.1,111.2 103.1,111.45 102.6,111.95 102.6,113.299 ; 94.777,88.003 94.777,87.753 95.277,87.253 95.277,85.904 ; 95.153,41.531 95.153,41.281 95.653,40.781 95.653,39.431 ; 95.279,85.902 95.279,87.252 94.779,87.752 94.779,88.002 103.779,88.002 103.781,88 103.781,85.903 103.782,85.902 ; 95.654,39.43 95.654,40.779 95.154,41.279 95.154,41.529 104.154,41.529 104.156,41.528 104.156,39.431 104.157,39.43 ; 97.475,79.503 97.476,79.501 97.476,77.404 97.477,77.403 106.477,77.403 106.477,77.653 105.977,78.153 105.977,79.502 ; 97.85,33.03 97.851,33.029 97.851,30.932 97.853,30.931 106.853,30.931 106.853,31.181 106.353,31.681 106.353,33.03 ; 102.602,119.699 102.602,121.049 102.102,121.549 102.102,121.799 111.102,121.799 111.103,121.797 111.103,119.7 111.104,119.699 ; 104.796,113.301 104.797,113.3 104.797,111.203 104.799,111.201 113.799,111.201 113.799,111.451 113.299,111.951 113.299,113.301 ; 105.979,85.902 105.979,87.252 105.479,87.752 105.479,88.002 114.479,88.002 114.481,88 114.481,85.903 114.482,85.902 ; 106.354,39.43 106.354,40.779 105.854,41.279 105.854,41.529 114.854,41.529 114.856,41.528 114.856,39.431 114.857,39.43 ; 108.173,79.504 108.175,79.503 108.175,77.406 108.176,77.404 117.176,77.404 117.176,77.654 116.676,78.154 116.676,79.504 ; 108.549,33.032 108.55,33.03 108.55,30.933 108.551,30.932 117.551,30.932 117.551,31.182 117.051,31.682 117.051,33.031 ; 113.302,119.699 113.302,121.049 112.802,121.549 112.802,121.799 121.802,121.799 121.803,121.797 121.803,119.7 121.804,119.699 ; 115.496,113.301 115.497,113.3 115.497,111.203 115.499,111.201 124.499,111.201 124.499,111.451 123.999,111.951 123.999,113.301 ; 116.679,85.902 116.679,87.252 116.179,87.752 116.179,88.002 125.179,88.002 125.181,88 125.181,85.903 125.182,85.902 ; 117.054,39.43 117.054,40.779 116.554,41.279 116.554,41.529 125.554,41.529 125.556,41.528 125.556,39.431 125.557,39.43 ; 118.873,79.504 118.875,79.503 118.875,77.406 118.876,77.404 127.876,77.404 127.876,77.654 127.376,78.154 127.376,79.504 ; 119.249,33.032 119.25,33.03 119.25,30.933 119.251,30.932 128.251,30.932 128.251,31.182 127.751,31.682 127.751,33.031 ; 124.002,119.699 124.002,121.049 123.502,121.549 123.502,121.799 132.502,121.799 132.503,121.797 132.503,119.7 132.504,119.699 ; 126.196,113.301 126.197,113.3 126.197,111.203 126.199,111.201 135.199,111.201 135.199,111.451 134.699,111.951 134.699,113.301 ; 127.379,85.902 127.379,87.252 126.879,87.752 126.879,88.002 135.879,88.002 135.881,88 135.881,85.903 135.882,85.902 ; 127.754,39.43 127.754,40.779 127.254,41.279 127.254,41.529 136.254,41.529 136.256,41.528 136.256,39.431 136.257,39.43 ; 129.573,79.504 129.575,79.503 129.575,77.406 129.576,77.404 138.576,77.404 138.576,77.654 138.076,78.154 138.076,79.504 ; 129.949,33.032 129.95,33.03 129.95,30.933 129.951,30.932 138.951,30.932 138.951,31.182 138.451,31.682 138.451,33.031 ; 134.702,119.699 134.702,121.049 134.202,121.549 134.202,121.799 143.202,121.799 143.203,121.797 143.203,119.7 143.204,119.699 ; 136.896,113.301 136.897,113.3 136.897,111.203 136.899,111.201 145.899,111.201 145.899,111.451 145.399,111.951 145.399,113.301 ; 138.079,85.902 138.079,87.252 137.579,87.752 137.579,88.002 146.579,88.002 146.581,88 146.581,85.903 146.582,85.902 ; 138.454,39.43 138.454,40.779 137.954,41.279 137.954,41.529 146.954,41.529 146.956,41.528 146.956,39.431 146.957,39.43 ; 140.273,79.504 140.275,79.503 140.275,77.406 140.276,77.404 149.276,77.404 149.276,77.654 148.776,78.154 148.776,79.504 ; 140.649,33.032 140.65,33.03 140.65,30.933 140.651,30.932 149.651,30.932 149.651,31.182 149.151,31.682 149.151,33.031 ; 145.402,119.699 145.402,121.049 144.902,121.549 144.902,121.799 153.902,121.799 153.903,121.797 153.903,119.7 153.904,119.699 ; 147.596,113.301 147.597,113.3 147.597,111.203 147.599,111.201 156.599,111.201 156.599,111.451 156.099,111.951 156.099,113.301 ; 148.779,85.902 148.779,87.252 148.279,87.752 148.279,88.002 157.279,88.002 157.281,88 157.281,85.903 157.282,85.902 ; 149.154,39.43 149.154,40.779 148.654,41.279 148.654,41.529 157.654,41.529 157.656,41.528 157.656,39.431 157.657,39.43 ; 150.973,79.504 150.975,79.503 150.975,77.406 150.976,77.404 159.976,77.404 159.976,77.654 159.476,78.154 159.476,79.504 ; 151.349,33.032 151.35,33.03 151.35,30.933 151.351,30.932 160.351,30.932 160.351,31.182 159.851,31.682 159.851,33.031 ; 156.102,119.699 156.102,121.049 155.602,121.549 155.602,121.799 164.602,121.799 164.603,121.797 164.603,119.7 164.604,119.699 ; 158.296,113.301 158.297,113.3 158.297,111.203 158.299,111.201 167.299,111.201 167.299,111.451 166.799,111.951 166.799,113.301 ; 159.479,85.902 159.479,87.252 158.979,87.752 158.979,88.002 167.979,88.002 167.981,88 167.981,85.903 167.982,85.902 ; 159.854,39.43 159.854,40.779 159.354,41.279 159.354,41.529 168.354,41.529 168.356,41.528 168.356,39.431 168.357,39.43 ; 161.673,79.504 161.675,79.503 161.675,77.406 161.676,77.404 170.676,77.404 170.676,77.654 170.176,78.154 170.176,79.504 ; 162.049,33.032 162.05,33.03 162.05,30.933 162.051,30.932 171.051,30.932 171.051,31.182 170.551,31.682 170.551,33.031 ; 166.3,121.8 166.3,121.55 166.8,121.05 166.8,119.701 ; 168.997,113.3 168.999,113.298 168.999,111.201 169,111.2 ; 169.677,88.003 169.677,87.753 170.177,87.253 170.177,85.904 ; 170.053,41.531 170.053,41.281 170.553,40.781 170.553,39.431 ; 172.375,79.503 172.376,79.501 172.376,77.404 172.377,77.403 ; 172.75,33.03 172.751,33.029 172.751,30.932 172.753,30.931
  Mid Layer 1 w0.2: 86.177,85.003 89.551,85.003 91.661,82.893 161.868,82.893 v2(164.077,85.103) ; 86.177,88.603 88.63,88.603 92.53,84.703 99.477,84.703 v2(99.877,85.103) ; 86.553,38.531 89.926,38.531 92.036,36.421 162.243,36.421 v2(164.453,38.631) ; 86.553,42.131 89.006,42.131 92.906,38.231 99.853,38.231 v2(100.253,38.631) ; 87.177,85.803 89.177,85.803 91.785,83.195 151.469,83.195 v2(153.377,85.103) ; 87.177,86.803 89.124,86.803 92.129,83.798 130.673,83.798 v2(131.977,85.103) ; 87.177,87.803 88.977,87.803 92.379,84.401 109.876,84.401 v2(110.577,85.103) ; 87.553,39.331 89.553,39.331 92.161,36.723 151.845,36.723 v2(153.753,38.631) ; 87.553,40.331 89.5,40.331 92.504,37.326 131.048,37.326 v2(132.353,38.631) ; 87.553,41.331 89.353,41.331 92.754,37.929 110.251,37.929 v2(110.953,38.631) ; 87.777,86.303 89.177,86.303 91.984,83.497 141.071,83.497 v2(142.677,85.103) ; 87.777,87.303 89.051,87.303 92.254,84.1 120.274,84.1 v2(121.277,85.103) ; 88.153,39.831 89.553,39.831 92.359,37.024 141.446,37.024 v2(143.053,38.631) ; 88.153,40.831 89.426,40.831 92.629,37.627 120.649,37.627 v2(121.653,38.631)
  other v1: 70.552,88.344 71.652,88.344 72.752,88.344 78.105,88.344 79.205,88.344 80.305,88.344 70.552,89.444 71.652,89.444 72.752,89.444 78.105,89.444 79.205,89.444 80.305,89.444 70.552,90.544 71.652,90.544 72.752,90.544 78.105,90.544 79.205,90.544 80.305,90.544 68.375,117.6 69.475,117.6 70.575,117.6 68.375,118.7 69.475,118.7 70.575,118.7 68.375,119.8 69.475,119.8 70.575,119.8

## Silkscreen, mask and mechanical layers (free items; w line width, h text height)
Top Overlay:
  lines w0.2: 85,110 170.5,110 170.5,123 85,123 85,110 ; 88.377,76.203 173.877,76.203 173.877,89.203 88.377,89.203 88.377,76.203 ; 88.753,29.731 174.253,29.731 174.253,42.731 88.753,42.731 88.753,29.731
Mechanical 1:
  lines w0.2: 2,0 2,169.3

## Text inside footprints (layer, text, board x,y; h text height)
C20: Top Overlay "+" at 40.8,87.7 h1.5
C21: Top Overlay "+" at 48.7,87.7 h1.5
P3: Top Overlay "20" at 187.768,126.364 h1.27 r90; Top Overlay "19" at 190.308,126.364 h1.27 r90; Top Overlay "1" at 190.308,99.44 h1.27 r90; Top Overlay "2" at 187.768,99.44 h1.27 r90